# Altium PCB OpAMp.PcbDoc
Units mil, origin at the board's own origin, x right, y up, seen from the top; angles counter-clockwise.
Board outline 6000 x 4000 mil, 2 copper layers (Top Layer, Bottom Layer); 10 components, 20 nets, 66 pads, 0 vias.
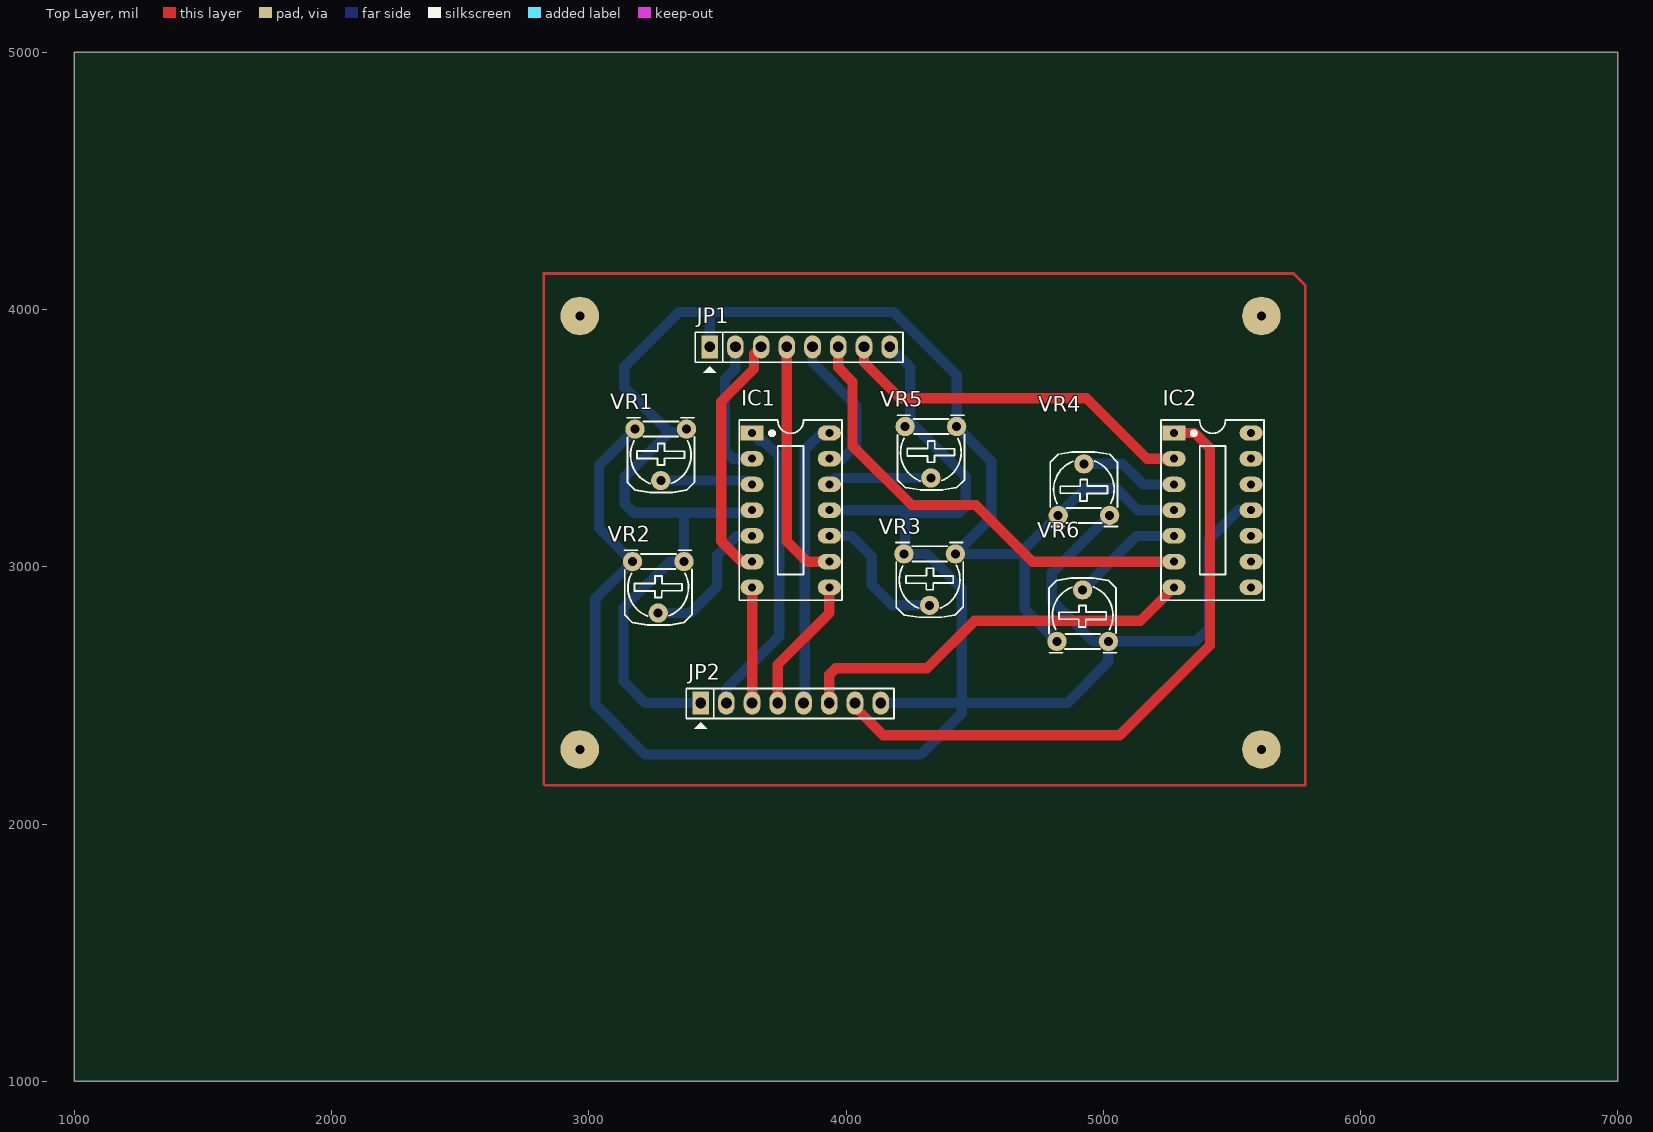
[diagram p0: Top Layer view]
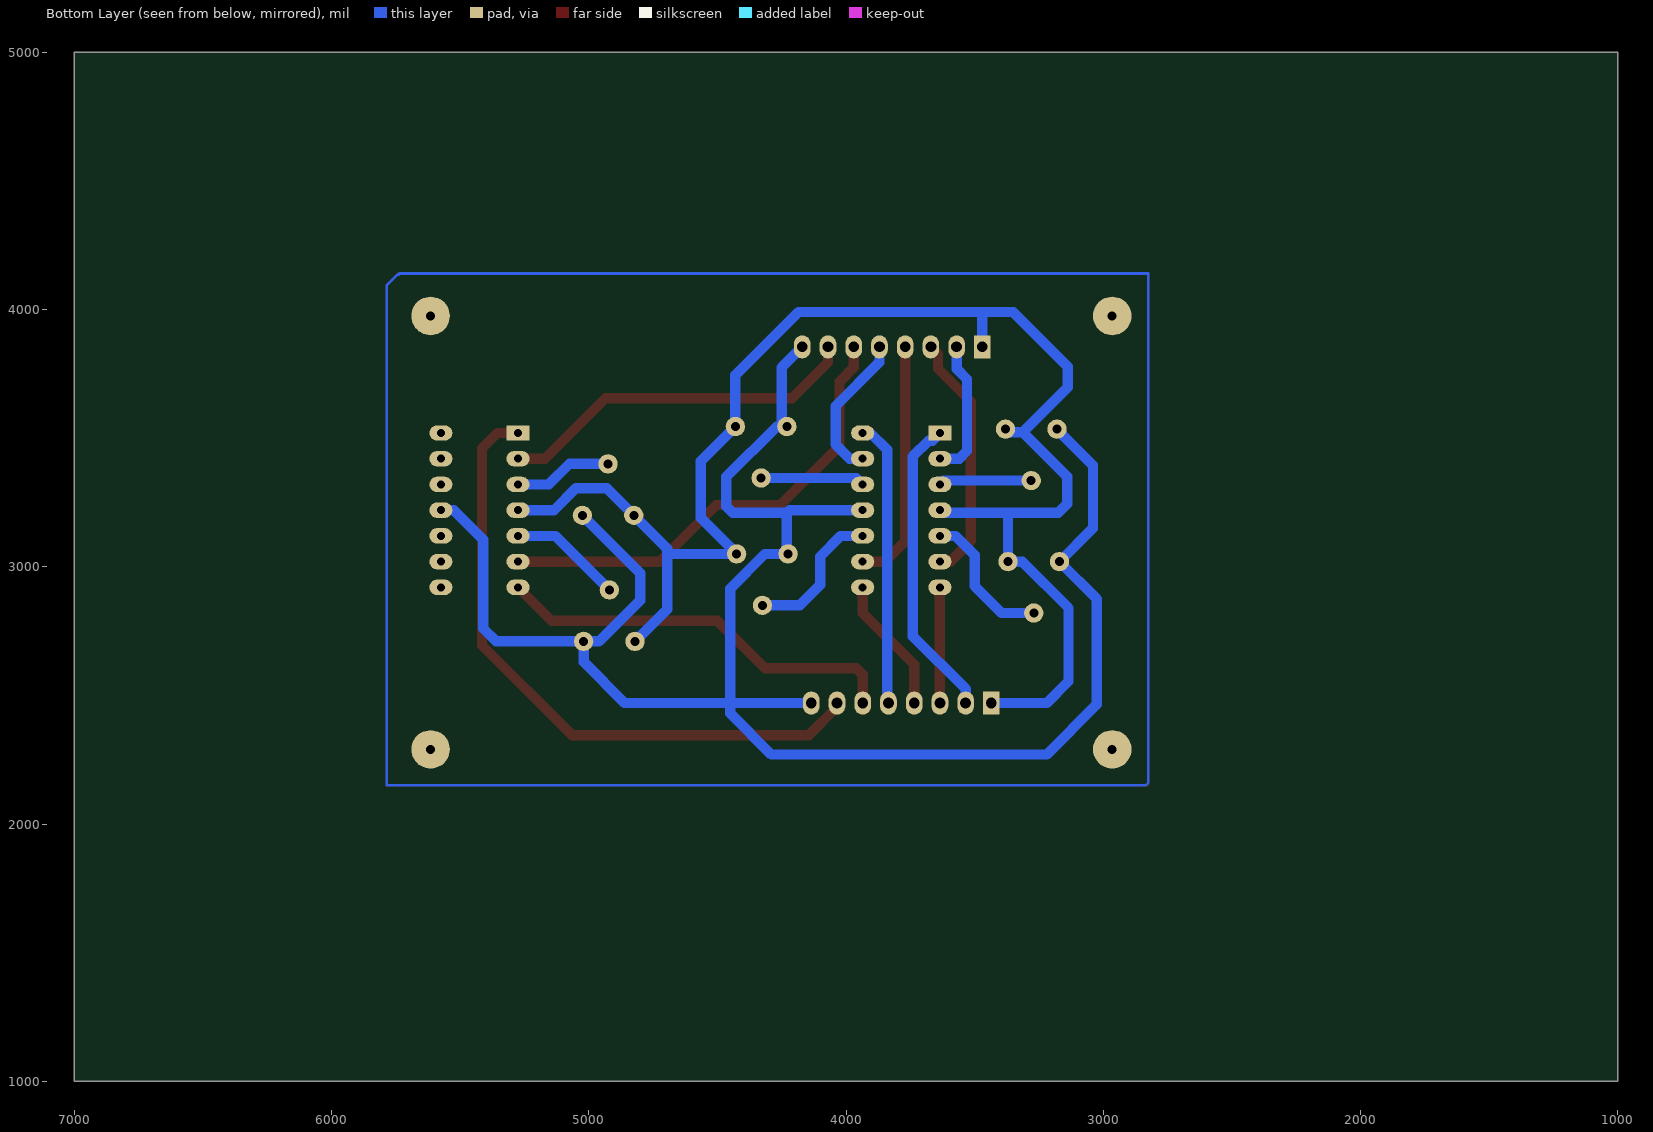
[diagram p1: Bottom Layer view, seen from below]
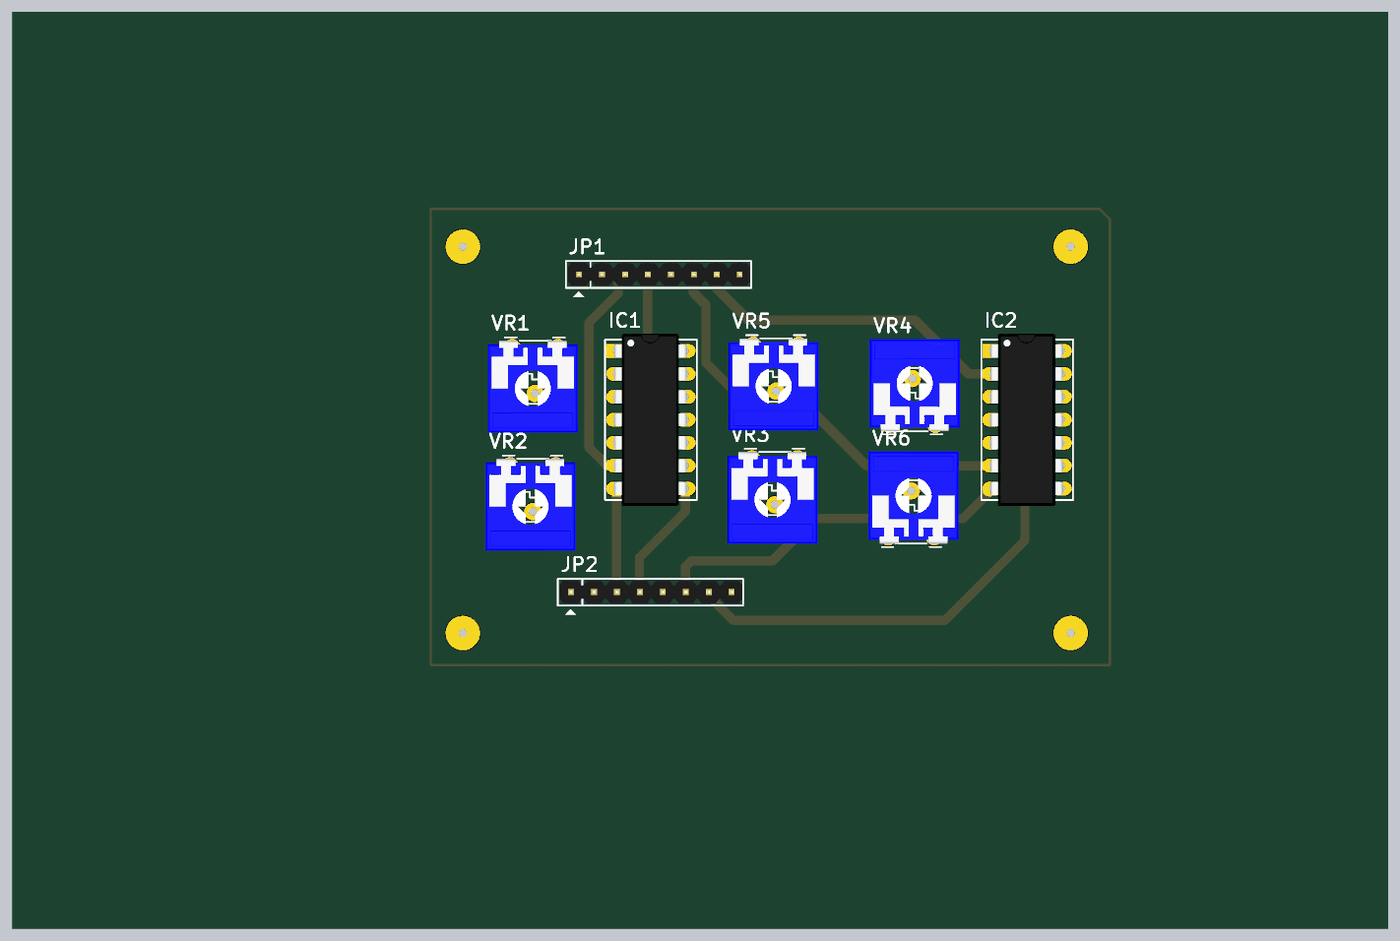
[diagram p2: 3D render of the assembled board from above, using the file's embedded part models]

## Layer stack, top to bottom
Top Solder: solder mask 0.4, Solder Resist, Dk 3.5
Top Layer: signal copper 1.4
Dielectric 1: dielectric 12.6, FR-4, Dk 4.8
Bottom Layer: signal copper 1.4
Bottom Solder: solder mask 0.4, Solder Resist, Dk 3.5

## Board outline
1000,1000 7000,1000 7000,5000 1000,5000

## Design rules (kind name [scope] priority, off if disabled: settings)
Clearance [All] p1: gap=20
PlaneConnect [All] p1: planeconnectstyle=Relief reliefexpansion=20 reliefentries=4 reliefconductorwidth=20 reliefairgap=10
PolygonConnect [All] p1: connectstyle=Relief reliefconductorwidth=20 reliefentries=4 polygonreliefangle="90 Angle" airgapwidth=10
RoomDefinition OpAMP_Sensor [InComponentClass('OpAMP_Sensor')] p1: confinementstyle=ConfineIn formatcopy=TRUE lockcomponents=FALSE outline 7045,1065 9240,1065 9240,1925 7045,1925
RoutingVias [All] p1: holewidth=35 width=65 viastyle="Through Hole" minholewidth=35 minwidth=65 maxholewidth=35 maxwidth=65
SolderMaskExpansion [All] p1: expansion=4
Width [All] p1: maxlimit=65 minlimit=24 preferedwidth=40
29 further rules are at their usual default settings.

## Classes and differential pairs
component class OpAMP_Sensor: IC1 JP1 JP2 VR1 VR2 VR3 VR4 VR5 VR6

## Components (designator, comment, footprint, x,y, rotation, side; value= is the part's Value field where it differs from the comment)
IC1 "LM324" DIP14/W0.3 3635,3520 r270 top
IC2 "LM324" DIP14/W0.3 5275,3520 r270 top
JP1 "JP8 PIN" JP8 3470,3855 r0 top
JP2 "JP8 PIN" JP8 3435,2470 r0 top
VR1 "10K" VR 3380,3535 r180 top
VR2 "10K" VR 3370,3020 r180 top
VR3 "10K" VR 4425,3050 r180 top
VR4 "10K" VR 4825,3200 r0 top
VR5 "10K" VR 4430,3545 r180 top
VR6 "10K" VR 4820,2710 r0 top

## Footprints (in the part's own frame and the unit in brackets; to place one, negate y for a bottom-side part, rotate by r counter-clockwise, add the part's x,y. Pads: shape width x height; smd on the part's side, far side on the other; paste and mask are expansions set on the pad)
DIP14/W0.3 [mil] "14PIN, W 300mil, Pin to pin 100mil"
  rect 60x90 hole 31: 1(0,0)
  oval 60x90 hole 31: 2(100,0) 3(200,0) 4(300,0) 5(400,0) 6(500,0) 7(600,0) 8(600,300) 9(500,300) 10(400,300) 11(300,300) 12(200,300) 13(100,300) 14(0,300)
  silkscreen extent -50,-50 650,350, body extent -75,-10 675,305, height 159
JP8 [mil] "JP8"
  rect 65x90 hole 42: 1(0,0)
  oval 65x90 hole 42: 2(100,0) 3(200,0) 4(300,0) 5(400,0) 6(500,0) 7(600,0) 8(700,0)
  silkscreen extent -56,-100 752,57, body extent -48,-50 748,48, height 323
VR [mil] "Resistor Variable"
  round 75 hole 35: 1(0,0) 2(100,200) 3(200,0)
  silkscreen extent -31,-44 231,246, body extent -87,-30 307,372, height 165

## Part data
IC1 IC2: "Op x 4"
JP1 JP2: library part JP8
VR1 VR2 VR3 VR4 VR5 VR6: library part VR1, "Var Resistor"

## Free pads (board coordinates)
  round 150 hole 35: 2(2965,2290) 2(2965,3975) 2(5615,2290) 2(5615,3975)

## Nets (pads, with @x,y where several pads share a name; then routed paths per layer and width w, separated by ;. In a path a pad name is that pad's centre, name@x,y a point inside that pad or via, vN(x,y) a via of type N, cw(c..) or ccw(c..) an arc to the next point about the centre after c; other vN are vias at no path point)
GND: IC1.11 IC2.11 JP1.8 JP2.8 VR1.3 VR2.3 VR3.3 VR4.3 VR5.3 VR6.3 | length 7777.7
  Bottom Layer w40: VR1.3 3040,3395 3040,3150 VR2.3 3025,2875 3025,2465 3220,2270 4290,2270 4450,2430 4450,2470 ; IC1.11 4220,3220 4230,3210 ; JP2.8 4450,2470 ; JP1.8 4250,3775 4250,3565 VR5.3 4270,3545 4465,3350 4465,3235 4440,3210 4230,3210 ; VR4.3 4800,2975 4800,2870 4960,2710 VR6.3 ; IC2.11 5525,3220 5410,3105 5410,2760 5360,2710 VR6.3 ; 4230,3210 4230,3055 VR3.3 4315,3050 4450,2915 4450,2470 ; 4450,2470 4860,2470 5020,2630 VR6.3
NetIC1_3: IC1.3 VR1.2 | length 361.2
  Bottom Layer w40: VR1.2 3620,3335 IC1.3
NetIC1_5: IC1.5 VR2.2 | length 559.6
  Bottom Layer w40: VR2.2 3395,2820 3500,2925 3500,3045 3575,3120 IC1.5
NetIC1_10: IC1.10 VR3.2 | length 566.3
  Bottom Layer w40: IC1.10 4020,3120 4100,3040 4100,2930 4180,2850 VR3.2
NetIC1_12: IC1.12 VR5.2 | length 405.4
  Bottom Layer w40: IC1.12 3960,3345 VR5.2
NetIC2_3: IC2.3 VR4.2 | length 383.1
  Bottom Layer w40: VR4.2 5075,3400 5155,3320 IC2.3
NetIC2_5: IC2.5 VR6.2 | length 442
  Bottom Layer w40: VR6.2 5130,3120 IC2.5
OUT1: IC1.2 JP1.2 | length 539
  Bottom Layer w40: JP1.2 3570,3770 3530,3730 3530,3450 3560,3420 IC1.2
OUT2: IC1.6 JP1.3 | length 972.3
  Top Layer w40: IC1.6 3595,3020 3515,3100 3515,3642.5 3642.5,3770 3642.5,3827.5 JP1.3
OUT3: IC1.9 JP1.4 | length 953.1
  Top Layer w30: IC1.9@3928.08,3020 IC1.9
  Top Layer w40: JP1.4 3770,3100 3850,3020 IC1.9@3928.08,3020
OUT4: IC1.13 JP1.5 | length 578.2
  Bottom Layer w40: JP1.5 3870,3795 4040,3625 4040,3475 3985,3420 IC1.13
OUT5: IC2.6 JP1.6 | length 1844.2
  Top Layer w40: JP1.6 3970,3775 4025,3720 4025,3470 4255,3240 4505,3240 4725,3020 IC2.6
OUT6: IC2.2 JP1.7 | length 1420.3
  Top Layer w40: JP1.7 4070,3795 4210,3655 4935,3655 5170,3420 IC2.2
SIGNAL1: IC1.1 JP2.2 | length 1193.5
  Bottom Layer w30: IC1.1 IC1.1@3641.92,3520
  Bottom Layer w40: JP2.2 3535,2525 3740,2730 3740,3428.99 3678.99,3490 3665,3490 IC1.1
SIGNAL2: IC1.7 JP2.3 | length 450
  Top Layer w40: JP2.3 IC1.7
SIGNAL3: IC1.8 JP2.4 | length 532.8
  Top Layer w40: JP2.4 3735,2620 3935,2820 IC1.8
SIGNAL4: IC1.14 JP2.5 | length 1109
  Bottom Layer w40: JP2.5 3840,2475 3840,3455 3905,3520 IC1.14
SIGNAL5: IC2.7 JP2.6 | length 1590.8
  Top Layer w40: JP2.6 3935,2580 3960,2605 4315,2605 4500,2790 5145,2790 IC2.7
SIGNAL6: IC2.1 JP2.7 | length 2515.4
  Top Layer w40: JP2.7 4035,2454.97 4144.97,2345 5065,2345 5415,2695 5415,3460 5355,3520 IC2.1
VCC: IC1.4 IC2.4 JP1.1 JP2.1 VR1.1 VR2.1 VR3.1 VR4.1 VR5.1 VR6.1 | length 6214
  Bottom Layer w30: 4565,3290 4570,3295
  Bottom Layer w40: VR1.1 3367.5,3522.5 3312.5,3522.5 ; JP2.1 3220,2470 3135,2555 3135,2840 3315,3020 VR2.1 3370,3210 ; JP1.1 3470,3985 3465,3990 ; IC1.4 3625,3210 3370,3210 ; VR6.1 4695,2835 4695,3045 ; IC2.4 5135,3220 5050,3305 4930,3305 VR4.1 4695,3070 4695,3045 ; 3312.5,3522.5 3137.5,3697.5 3137.5,3777.5 3350,3990 3465,3990 ; 3312.5,3522.5 3140,3350 3140,3245 3175,3210 3370,3210 ; 3465,3990 4185,3990 4430,3745 VR5.1 4565,3410 4565,3290 4565,3190 VR3.1 4690,3050 4695,3045
pads on no net: IC2.8 IC2.9 IC2.10 IC2.12 IC2.13 IC2.14
copper on no net: | length 19738.5
  Top Layer w10: 2825,2155 2830,2150 5785,2150 5785,4095 5740,4140 2845,4140 2830,4140 2825,4140 2825,2155
  Bottom Layer w10: 2825,2160 2825,4140 5735,4140 5740,4135 5745,4135 5785,4095 5785,2150 2835,2150 2825,2160